# EAGLE board baseI2C (EAGLE 7.7.0)
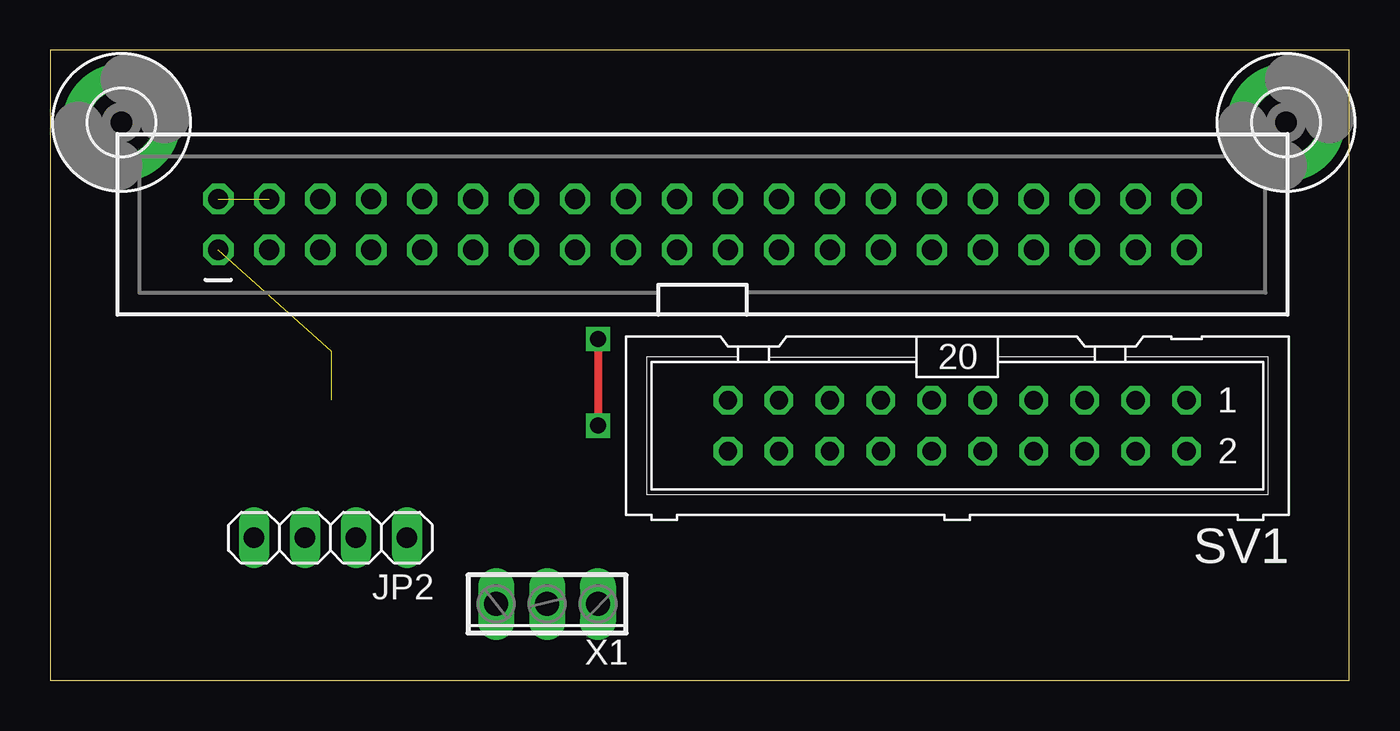
[diagram p0: board, top side]
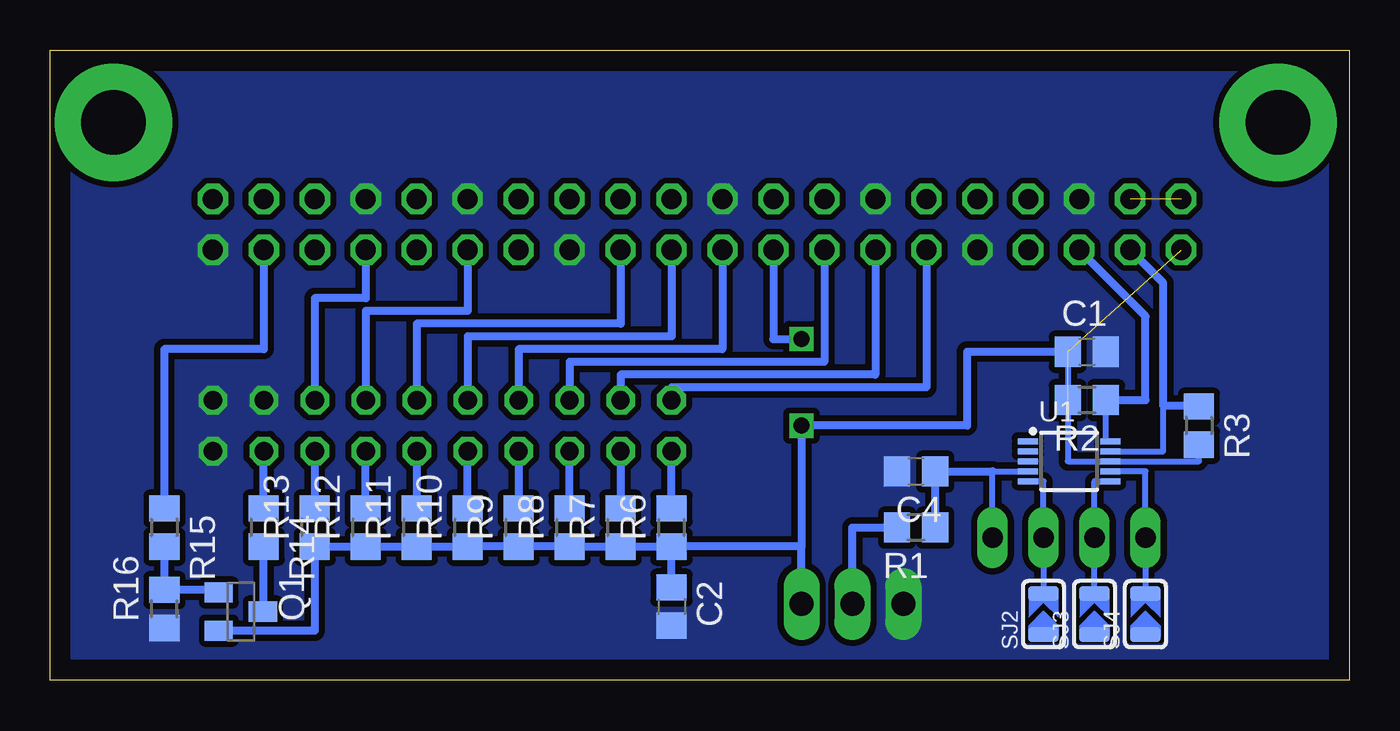
[diagram p1: board, bottom side, seen from below]

Size 64.75 x 31.42 mm. Coordinates in mm from the lower left corner, seen from the top.
Outline: 0,0 64.75,0 64.75,31.42 0,31.42 0,0
Copper layers (1*16): Top 0.035mm / dielectric 1.5mm / Bottom 0.035mm
Design rules "default": minimum track width 10mil, minimum drill 24mil, track to track 8mil, track to pad 8mil, pad to pad 8mil, via to via 8mil, smd to smd 8mil, copper to edge 40mil, drill to drill 8mil, minimum pad ring 10mil, minimum via ring 8mil, stop-mask expansion 4mil, vias tented up to drill 0mil, thermal gap 10mil

## Footprints (pad centres in the part's own frame; a part is rotated, then mirrored left to right if it is on the bottom)
C0805 = smd 1.3 x 1.5: 1 -0.95,0; 2 0.95,0
3,2-PAD = drill 3.2 pad 5.842: B3,2 0,0
2X20-SHROUDED-THIN = drill 1 octagon: 1 -1.27,24.13; 2 1.27,24.13; 3 -1.27,21.59; 4 1.27,21.59; 5 -1.27,19.05; 6 1.27,19.05; 7 -1.27,16.51; 8 1.27,16.51; 9 -1.27,13.97; 10 1.27,13.97; 11 -1.27,11.43; 12 1.27,11.43; 13 -1.27,8.89; 14 1.27,8.89; 15 -1.27,6.35; 16 1.27,6.35; 17 -1.27,3.81; 18 1.27,3.81; 19 -1.27,1.27; 20 1.27,1.27; 21 -1.27,-1.27; 22 1.27,-1.27; 23 -1.27,-3.81; 24 1.27,-3.81; 25 -1.27,-6.35; 26 1.27,-6.35; 27 -1.27,-8.89; 28 1.27,-8.89; 29 -1.27,-11.43; 30 1.27,-11.43; 31 -1.27,-13.97; 32 1.27,-13.97; 33 -1.27,-16.51; 34 1.27,-16.51; 35 -1.27,-19.05; 36 1.27,-19.05; 37 -1.27,-21.59; 38 1.27,-21.59; 39 -1.27,-24.13; 40 1.27,-24.13
1X04 = drill 1.016 long: 1 -3.81,0; 2 -1.27,0; 3 1.27,0; 4 3.81,0
SOT23-BEC = smd 1 x 1.4: B -0.95,-1.1; C 0,1.1; E 0.95,-1.1
R0805 = smd 1.3 x 1.5: 1 -0.95,0; 2 0.95,0
SOLDERJUMPER_ARROW_NOPASTE = smd 0.762 x 1.524: 1 -1.016,0; 2 1.016,0
ML20 = drill 0.914 octagon: 1 -11.43,-1.27; 2 -11.43,1.27; 3 -8.89,-1.27; 4 -8.89,1.27; 5 -6.35,-1.27; 6 -6.35,1.27; 7 -3.81,-1.27; 8 -3.81,1.27; 9 -1.27,-1.27; 10 -1.27,1.27; 11 1.27,-1.27; 12 1.27,1.27; 13 3.81,-1.27; 14 3.81,1.27; 15 6.35,-1.27; 16 6.35,1.27; 17 8.89,-1.27; 18 8.89,1.27; 19 11.43,-1.27; 20 11.43,1.27
MSOP10 = smd 0.3 x 1: 1 -1,-2.05; 2 -0.5,-2.05; 3 0,-2.05; 4 0.5,-2.05; 5 1,-2.05; 6 1,2.05; 7 0.5,2.05; 8 0,2.05; 9 -0.5,2.05; 10 -1,2.05
3POL254 = drill 1.2 long: 1 -2.54,0; 2 0,0; 3 2.54,0

## Placement (x,y rotation side)
C1  0.1uF  [C0805]  13.08,16.38 0 bottom
C2  0.1uF  [C0805]  33.78,3.68 270 bottom
C4  0.1uF  [C0805]  21.59,10.41 180 bottom
H2  MOUNT-PAD-ROUND3.2  [3,2-PAD]  3.56,27.81 0 top
H3  MOUNT-PAD-ROUND3.2  [3,2-PAD]  61.59,27.81 0 top
J2  RASPBERRYPI-40-PIN-GPIOTHIN  [2X20-SHROUDED-THIN]  32.51,22.73 90 top
JP2  [1X04]  13.97,7.11 180 top
Q1  MMBT3906LT1SMD  [SOT23-BEC]  55.24,3.43 270 bottom
R1  10k  [R0805]  21.59,7.62 180 bottom
R2  10k  [R0805]  13.08,13.97 180 bottom
R3  10k  [R0805]  7.49,12.7 270 bottom
R6  10k  [R0805]  33.78,7.62 90 bottom
R7  10  [R0805]  36.32,7.62 90 bottom
R8  10k  [R0805]  38.86,7.62 90 bottom
R9  10  [R0805]  41.4,7.62 90 bottom
R10  10k  [R0805]  43.94,7.62 90 bottom
R11  10  [R0805]  46.48,7.62 90 bottom
R12  10k  [R0805]  49.02,7.62 90 bottom
R13  10  [R0805]  51.56,7.62 90 bottom
R14  10  [R0805]  54.1,7.62 270 bottom
R15  10k  [R0805]  59.05,7.62 270 bottom
R16  10k  [R0805]  59.05,3.56 90 bottom
SJ2  [SOLDERJUMPER_ARROW_NOPASTE]  15.24,3.3 90 bottom
SJ3  [SOLDERJUMPER_ARROW_NOPASTE]  12.7,3.3 90 bottom
SJ4  [SOLDERJUMPER_ARROW_NOPASTE]  10.16,3.3 90 bottom
SV1  [ML20]  45.21,12.7 180 top
U1  ADS1015  [MSOP10]  13.97,10.92 270 bottom
X1  [3POL254]  24.77,3.81 180 top

## Library data of the parts
C1 C2 C4 = rcl
H2 H3 = holes
J2 = SparkFun-Boards
JP2 = pinhead
Q1 = transistor-pnp
R1-R3 R6-R16 = resistor
SJ2-SJ4 = microbuilder; BOM: EXCLUDE
SV1 = con-ml; OC_FARNELL: unknown; OC_NEWARK: unknown
U1 = SparkFun-AnalogIC; PROD_ID: IC-12239
X1 = con-phoenix-254; OC_FARNELL: unknown; OC_NEWARK: unknown

## Nets
+3V3: C1.1 C2.1 J2.1 J2.17 Q1.E R2.2 R3.2 R6.1 R7.1 R8.1 R9.1 R10.1 R11.1 R12.1 R13.1 U1.8 X1.1
+5V: J2.2 J2.4
GND: C1.2 C2.2 C4.2 J2.6 J2.9 J2.14 J2.20 J2.25 J2.30 J2.34 J2.39 R16.1 SJ2.1 SJ3.1 SJ4.1 SV1.1 SV1.2 SV1.3 U1.3 X1.3
L1: J2.13 SV1.17
L2: J2.19 SV1.13
L3: J2.23 SV1.9
L4: J2.33 SV1.5
L5: J2.37 R15.1
N$1: Q1.C R14.2
N$2: Q1.B R15.2 R16.2
N$3: R8.2 SV1.16
N$4: R9.2 SV1.14
N$5: R6.2 SV1.20
N$6: R7.2 SV1.18
N$7: R10.2 SV1.12
N$8: JP2.2 SJ2.2 U1.5
N$9: R1.2 X1.2
N$10: R11.2 SV1.10
N$11: JP2.3 SJ3.2 U1.6
N$12: JP2.4 SJ4.2 U1.7
N$13: R12.2 SV1.8
N$14: R13.2 SV1.6
N$15: R14.1 SV1.4
SCL: J2.5 R2.1 U1.10
SDA: J2.3 R3.1 U1.9
SW1: J2.11 SV1.19
SW2: J2.15 SV1.15
SW3: J2.21 SV1.11
SW4: J2.29 SV1.7
VOL: C4.1 JP2.1 R1.1 U1.4

## Tracks (layer width: path | path; a pad name or v marks a point on that pad's centre or on a via)
+3V3  (via drill 0.8)  (2 unrouted)
  Top 0.406: v27.3,17.02 v27.3,12.7
  Bottom 0.305: C1.1 14.04,10.92 U1.8 7.49,10.92 R3.2
  Bottom 0.406: R6.1 R7.1 R8.1 R9.1 R10.1 R11.1 R12.1 R13.1 51.56,2.48 Q1.E | R6.1 | C2.1 R6.1 | J2.17 28.7,17.02 v27.3,17.02 | 27.3,6.67 v27.3,12.7 19.05,12.7 19.05,16.38 C1.1 | 27.3,6.67 R6.1 | X1.1 27.3,6.67
+5V  (1 unrouted)
GND
  pour Bottom (isolate 0.305, no thermals): -8.89,-10.16 77.47,-10.16 77.47,40.64 -8.89,40.64
L1
  Bottom 0.406: J2.13 23.62,15.24 36.32,15.24 SV1.17
L2
  Bottom 0.406: J2.19 31.24,16.51 41.4,16.51 SV1.13
L3
  Bottom 0.406: J2.23 36.32,17.78 46.48,17.78 SV1.9
L4
  Bottom 0.406: J2.33 49.02,19.05 51.56,19.05 SV1.5
L5
  Bottom 0.406: R15.1 59.05,16.51 54.1,16.51 J2.37
N$1
  Bottom 0.406: Q1.C 54.1,3.47 R14.2
N$2
  Bottom 0.406: R15.2 R16.2 56.47,4.51 Q1.B
N$3
  Bottom 0.406: R8.2 SV1.16
N$4
  Bottom 0.406: SV1.14 R9.2
N$5
  Bottom 0.406: R6.2 SV1.20
N$6
  Bottom 0.406: SV1.18 R7.2
N$7
  Bottom 0.406: R10.2 SV1.12
N$8
  Bottom 0.305: SJ2.2 JP2.2 15.24,9.92 U1.5
N$9
  Bottom 0.406: X1.2 24.77,7.62 R1.2
N$10
  Bottom 0.406: SV1.10 R11.2
N$11
  Bottom 0.305: SJ3.2 JP2.3 12.7,9.92 U1.6
N$12
  Bottom 0.305: U1.7 10.16,10.42 JP2.4 SJ4.2
N$13
  Bottom 0.406: R12.2 SV1.8
N$14
  Bottom 0.406: SV1.6 R13.2
N$15
  Bottom 0.406: R14.1 SV1.4
SCL
  Bottom 0.305: U1.10 12.13,11.92 R2.1
  Bottom 0.406: R2.1 10.16,13.97 10.16,18.16 J2.5
SDA
  Bottom 0.305: U1.9 9.27,11.42 9.27,13.72
  Bottom 0.406: J2.3 9.27,19.81 9.27,13.72 7.56,13.72 R3.1
SW1
  Bottom 0.406: J2.11 21.08,14.61 33.78,14.61 SV1.19
SW2
  Bottom 0.406: J2.15 26.16,15.88 38.86,15.88 SV1.15
SW3
  Bottom 0.406: J2.21 33.78,17.14 43.94,17.14 SV1.11
SW4
  Bottom 0.406: J2.29 43.94,18.41 49.02,18.41 SV1.7
VOL
  Bottom 0.305: JP2.1 17.78,10.42 U1.4
  Bottom 0.406: R1.1 C4.1 17.78,10.41 17.78,10.42